# EAGLE board Enclosure.Front.9LED (EAGLE 7.6.0)

Size 60 x 22.7 mm. Coordinates in mm from the lower left corner, seen from the top.
Outline: 0,0 60,0 60,22.7 0,22.7 0,0
Copper layers (1*16): Top 0.035mm / dielectric 1.5mm / Bottom 0.035mm
Design rules "default": minimum track width 10mil, minimum drill 24mil, track to track 8mil, track to pad 8mil, pad to pad 8mil, via to via 8mil, smd to smd 8mil, copper to edge 40mil, drill to drill 8mil, minimum pad ring 10mil, minimum via ring 8mil, stop-mask expansion 4mil, vias tented up to drill 0mil, thermal gap 10mil

## Footprints (pad centres in the part's own frame; a part is rotated, then mirrored left to right if it is on the bottom)
1206 = smd 1.6 x 1.803: A -1.422,0; C 1.422,0
1X10-BIG = drill 1.016 pad 1.778 octagon: 1 -11.43,0; 2 -8.89,0; 3 -6.35,0; 4 -3.81,0; 5 -1.27,0; 6 1.27,0; 7 3.81,0; 8 6.35,0; 9 8.89,0; 10 11.43,0
SIP10 = drill 0.6 long: 1 -11.46,0; 2 -8.92,0; 3 -6.38,0; 4 -3.84,0; 5 -1.3,0; 6 1.24,0; 7 3.78,0; 8 6.32,0; 9 8.86,0; 10 11.4,0
SOLDERJUMPER_REFLOW_NOPASTE = smd 1.168 x 1.6: 1 -0.762,0; 2 0.762,0

## Placement (x,y rotation side)
LED0  [1206]  12.5,18.5 0 top
LED1  [1206]  17.5,18.5 0 top
LED2  [1206]  22.5,18.5 0 top
LED3  [1206]  27.5,18.5 0 top
LED4  [1206]  32.5,18.5 0 top
LED5  [1206]  37.5,18.5 0 top
LED6  [1206]  42.5,18.5 0 top
LED7  [1206]  47.5,18.5 0 top
NUSBIO  PINHD-1X10  [1X10-BIG]  30,13.43 0 top
NUSBIO_IN  PINHD-1X10  [1X10-BIG]  30,9.87 0 top
POWER  [1206]  55,4 0 top
RN_300  [SIP10]  30,7 180 bottom
SJ1  [SOLDERJUMPER_REFLOW_NOPASTE]  13,7 0 bottom

## Library data of the parts
LED0 LED1-LED7 NUSBIO NUSBIO_IN POWER = adafruit
RN_300 = resistor-sip
SJ1 = microbuilder

## Nets
GND: NUSBIO.10 NUSBIO_IN.10 SJ1.1
GPIO_0: LED0.A NUSBIO.1 NUSBIO_IN.1
GPIO_1: LED1.A NUSBIO.2 NUSBIO_IN.2
GPIO_2: LED2.A NUSBIO.3 NUSBIO_IN.3
GPIO_3: LED3.A NUSBIO.4 NUSBIO_IN.4
GPIO_4: LED4.A NUSBIO.5 NUSBIO_IN.5
GPIO_5: LED5.A NUSBIO.6 NUSBIO_IN.6
GPIO_6: LED6.A NUSBIO.7 NUSBIO_IN.7
GPIO_7: LED7.A NUSBIO.8 NUSBIO_IN.8
N$1: POWER.C RN_300.2
N$2: RN_300.1 SJ1.2
N$3: LED7.C RN_300.10
N$4: LED6.C RN_300.9
N$5: LED5.C RN_300.8
N$6: LED4.C RN_300.7
N$7: LED3.C RN_300.6
N$8: LED2.C RN_300.5
N$9: LED1.C RN_300.4
N$10: LED0.C RN_300.3
VCC: NUSBIO.9 NUSBIO_IN.9 POWER.A

## Tracks (layer width: path | path; a pad name or v marks a point on that pad's centre or on a via)
GND  (2 unrouted)
GPIO_0  (2 unrouted)
GPIO_1  (2 unrouted)
GPIO_2  (2 unrouted)
GPIO_3  (2 unrouted)
GPIO_4  (2 unrouted)
GPIO_5  (2 unrouted)
GPIO_6  (2 unrouted)
GPIO_7  (2 unrouted)
N$1  (1 unrouted)
N$2  (1 unrouted)
N$3  (1 unrouted)
N$4  (1 unrouted)
N$5  (1 unrouted)
N$6  (1 unrouted)
N$7  (1 unrouted)
N$8  (1 unrouted)
N$9  (1 unrouted)
N$10  (1 unrouted)
VCC  (2 unrouted)

## Text on the board
tNames: 0 | 1 | 2 | 3 | 4 | 5 | 6 | 7 | VCC | GND
bNames: LED + on the left facing forward | ^ GndForResistorArray | PCBv1 2017.03